# Altium PCB LEDS! PCB.PcbDoc
Units mm, origin at the board's own origin, x right, y up, seen from the top; angles counter-clockwise.
Board outline 26 x 20 mm, 2 copper layers (Top Layer, Bottom Layer); 8 components, 5 nets, 21 pads, 1 vias.
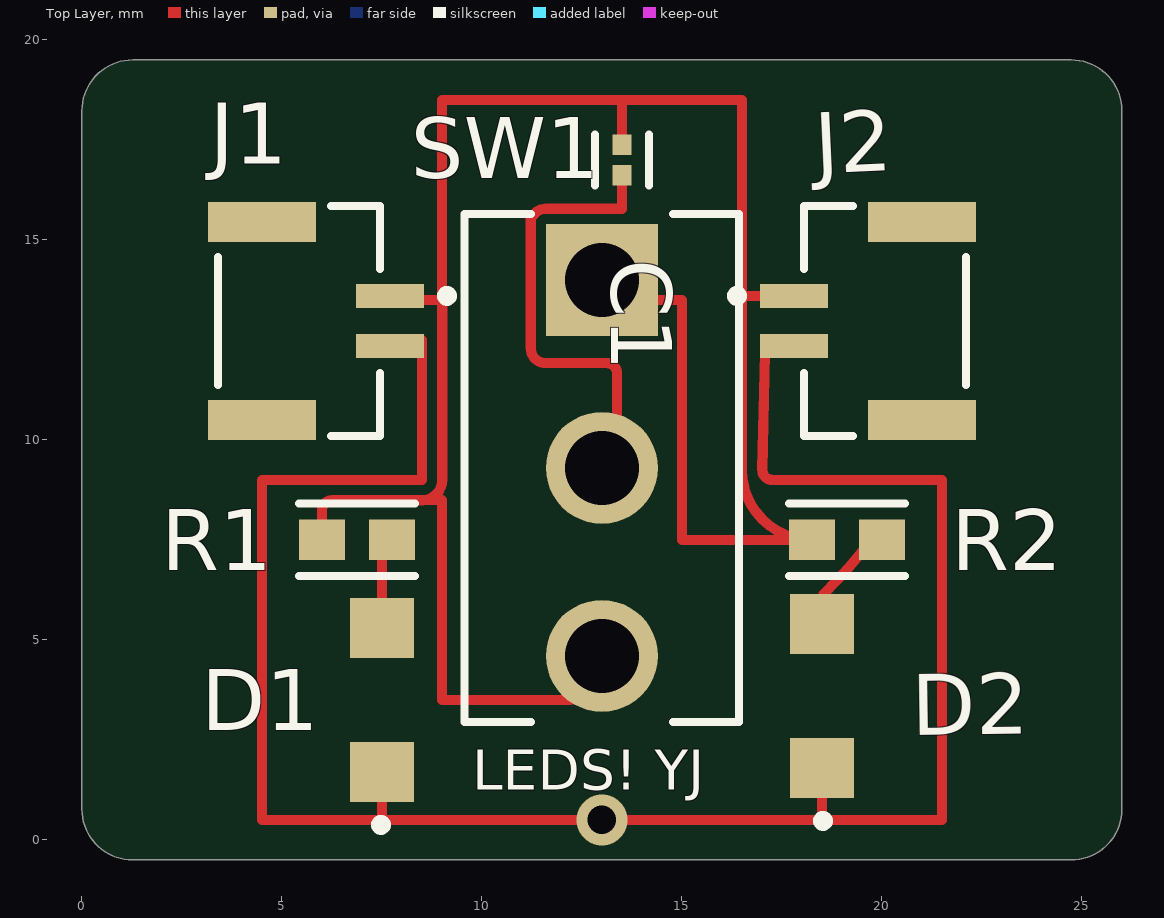
[diagram p0: Top Layer view]
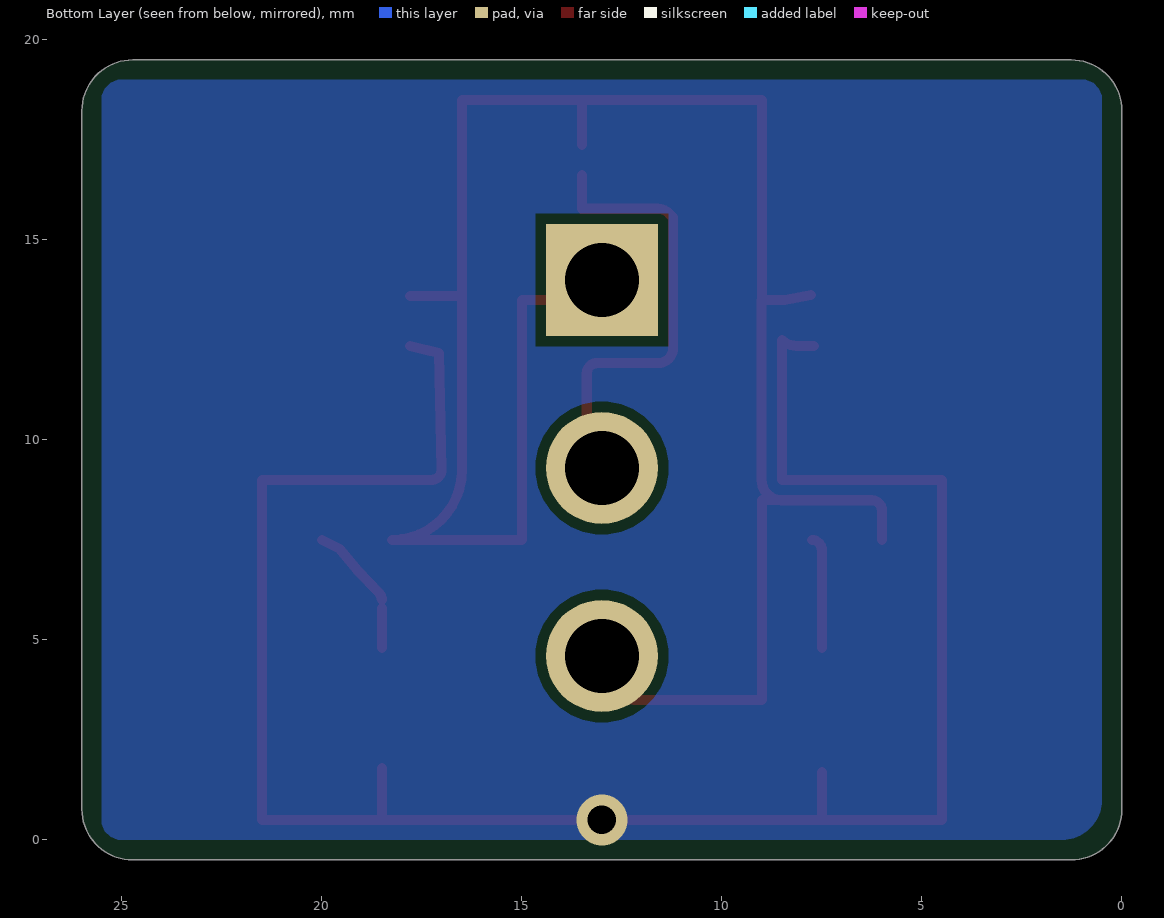
[diagram p1: Bottom Layer view, seen from below]
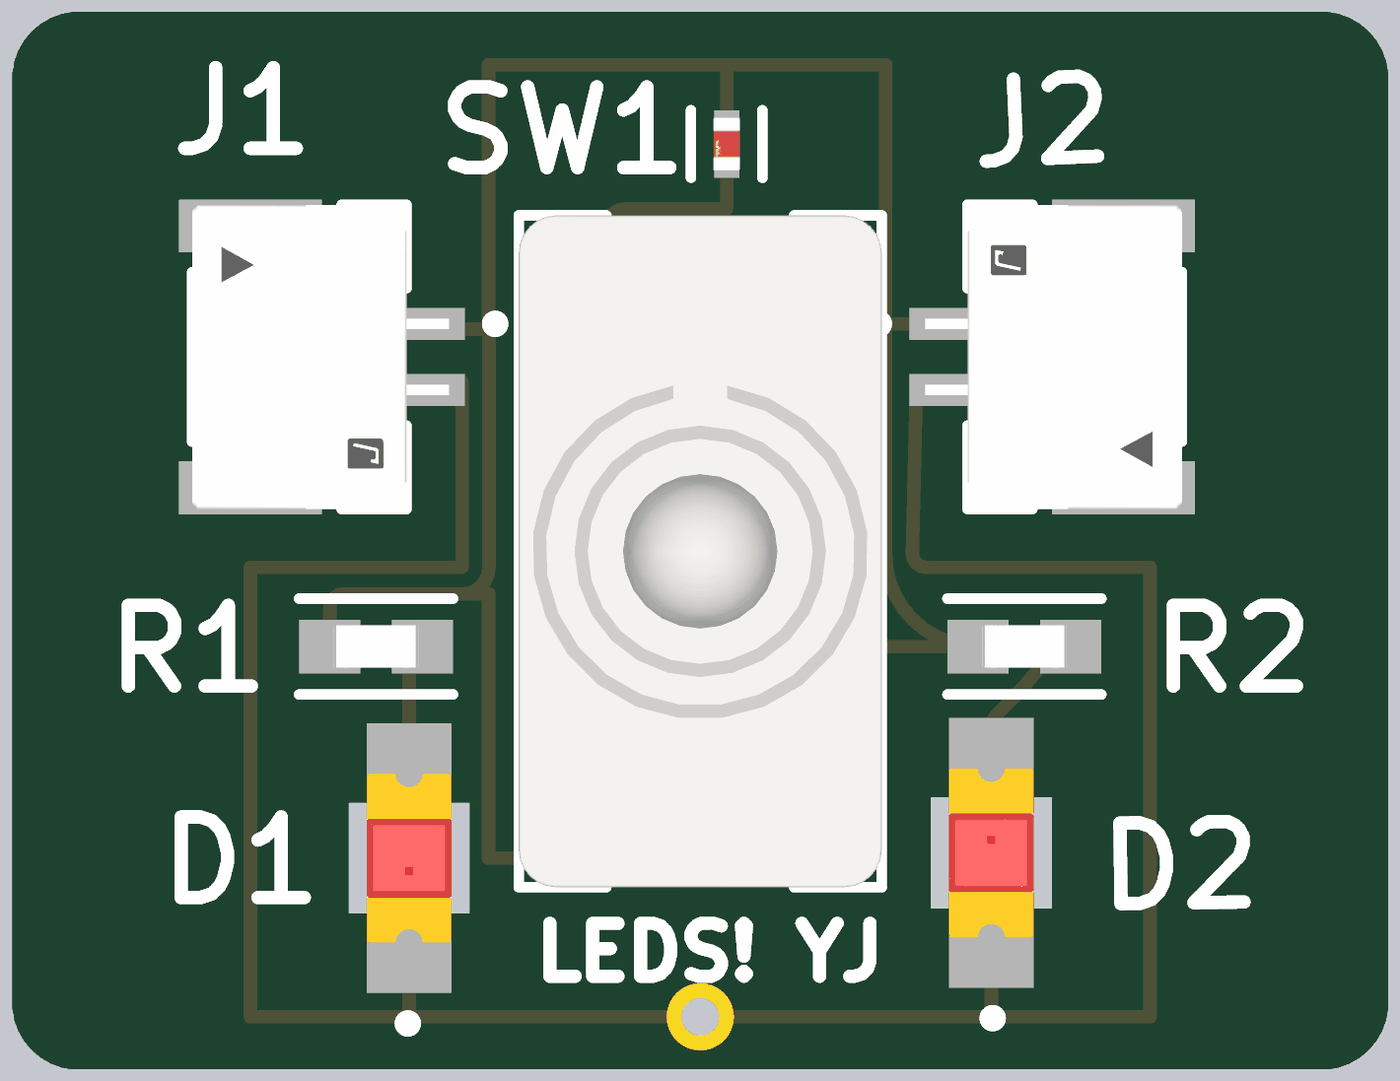
[diagram p2: 3D render of the assembled board from above, using the file's embedded part models]

## Layer stack, top to bottom
Top Solder: solder mask 0.0102, Solder Resist, Dk 3.5
Top Layer: signal copper 0.0356
Dielectric 1: dielectric 0.32, FR-4, Dk 4.8
Bottom Layer: signal copper 0.0356
Bottom Solder: solder mask 0.0102, Solder Resist, Dk 3.5

## Board outline
0,0.77 0,18.23 cw(c1.27,18.23) 1.27,19.5 24.73,19.5 cw(c24.73,18.23) 26,18.23 26,0.77 cw(c24.73,0.77) 24.73,-0.5 1.27,-0.5 cw(c1.27,0.77)

## Design rules (kind name [scope] priority, off if disabled: settings)
Clearance [C1 vs C1] p1: gap=0.254 ignorepadtopadclearanceinfootprint=FALSE except(0.15: SMDPad-SMDPad)
PolygonConnect [All] p1: connectstyle=Relief reliefconductorwidth=0.254 reliefentries=4 polygonreliefangle="90 Angle" airgapwidth=0.254
RoutingVias [All] p1: holewidth=0.711 width=1.27 viastyle="Through Hole" minholewidth=0.711 minwidth=1.27 maxholewidth=0.711 maxwidth=1.27
SolderMaskExpansion [All] p1: expansion=0 istentingtop=FALSE
SupplyNets "Schematic Supply Nets_1" [InNet('GND')] p1: voltage=0.000
SupplyNets "Schematic Supply Nets" [InNet('LED1_A')] p2: voltage=0.000
Width [All] p1: maxlimit=0.254 minlimit=0.254 preferedwidth=0.254
30 further rules are at their usual default settings.

## Components (designator, comment, footprint, x,y, rotation, side; value= is the part's Value field where it differs from the comment)
C1 "0.1 uF" FP-GRM155-0_05-IPC_C 13.5,17 r270 top
D1 "Red" FP-LTST-C230EKT-MFG 7.5,3.5 r90 top
D2 "Red" FP-LTST-C230EKT-MFG 18.5,3.6 r90 top
J1 "SM02B-GHS-TB(LF)(SN)" FP-SM02B-GHS-TB_LF_SN-MFG#1 5.425,12.975 r270 top
J2 "SM02B-GHS-TB(LF)(SN)" FP-SM02B-GHS-TB_LF_SN-MFG#2 20.075,12.975 r270 top
R1 "1k" FP-RN73R1J-IPC_A 6.875,7.5 r0 top
R2 "1k" FP-RN73R1J-IPC_A 19.125,7.5 r0 top
SW1 "Switch" FP-7103SYCQE-MFG 13,9.3 r0 top

## Footprints (in the part's own frame and the unit in brackets; to place one, negate y for a bottom-side part, rotate by r counter-clockwise, add the part's x,y. Pads: shape width x height; smd on the part's side, far side on the other; paste and mask are expansions set on the pad)
FP-7103SYCQE-MFG [mm]
  rect 2.8x2.8 hole 1.85 paste-2539.97 mask+0: 1(0,4.7)
  round 2.8 hole 1.85 paste-2539.97 mask+0: 2(0,0) 3(0,-4.7)
  silkscreen extent -3.43,-6.35 3.43,6.35, body extent -3.53,-6.45 3.53,6.45, height 0.25
FP-GRM155-0_05-IPC_C [mm]
  rect 0.515x0.472 smd paste+0 mask+0: 1(-0.379,0) 2(0.379,0)
  silkscreen extent -0.64,-0.67 0.64,0.67, body extent -0.74,-0.38 0.74,0.38, height 0.25
FP-LTST-C230EKT-MFG [mm]
  rect 1.5x1.6 smd paste+0 mask+0: 1(-1.8,0) 2(1.8,0)
  silkscreen extent -3.25,-0.1 -3,0.15, body extent -2.65,-0.95 2.65,0.95, height 0.25
FP-RN73R1J-IPC_A [mm]
  rect 1.156x1.012 smd paste+0 mask+0: 1(-0.875,0) 2(0.875,0)
  silkscreen extent -1.45,-0.91 1.45,0.91, body extent -1.95,-1.01 1.95,1.01, height 0.25
FP-SM02B-GHS-TB_LF_SN-MFG#1 [mm]
  rect 0.6x1.7 smd paste+0 mask+0: 1(-0.625,2.275) 2(0.625,2.275)
  rect 1x2.7 smd paste+0 mask+0: 3(-2.475,-0.925) 4(2.475,-0.925)
  silkscreen extent -2.88,-2.02 2.88,3.83, body extent -3.08,-2.37 3.08,3.22, height 0.25
FP-SM02B-GHS-TB_LF_SN-MFG#2 [mm]
  rect 0.6x1.7 smd paste+0 mask+0: 1(-0.625,-2.275) 2(0.625,-2.275)
  rect 1x2.7 smd paste+0 mask+0: 3(-2.475,0.925) 4(2.475,0.925)
  silkscreen extent -2.88,-3.82 2.88,2.02, body extent -2.88,-2.83 2.88,2.02, height 4.35

## Part data
C1: library part CMP-06035-003995-1, "Chip Multilayer Ceramic Capacitors for General Purpose, 0402, 0.10uF, X7R, 15%, 10%, 25V", Capacitance=100nF, Case Code (Imperial)=0402, Case Code (Metric)=1005, Dielectric=X7R, Max Operating Temperature=125°C, Min Operating Temperature=-55°C, Package Quantity=50000, Resistor Type=Ceramic, Tolerance=10%, Voltage Rating=25V, Case/Package=0402, Height=0.5mm, Length=0.039inch, Mount="Surface Mount", Packaging="Tape and Reel", Termination=SMD/SMT, Thickness=0.022inch, Voltage Rating (DC)=25V, Weight=0.000212oz, Width=0.5mm
D1 D2: library part CMP-22017-000030-1, "LED RED CLEAR CHIP SMD", Case Code (Imperial)=1206, Case Code (Metric)=3216, Forward Current=30mA, Forward Voltage=2V, Lens Color=Colorless, Max Operating Temperature=85°C, Min Operating Temperature=-55°C, Package Quantity=1, Power Dissipation=100mW, Reverse Voltage=5V, Test Current=10mA, Case/Package=1206, Color=Red, Depth=1.6mm, Dominant Wavelength=621nm, Height=1.1mm, Illumination Color=Red, Lead Free="Lead Free", Length=3.2mm, Lens Style=Diffused, Lens Transparency=Clear, Luminous Intensity=6mcd, Mount="Surface Mount", Number of Elements=1, Number of LEDs=1, Number of Pins=2, Packaging="Tape and Reel", Power Rating=100mW, Radiation Hardening=No, Viewing Angle=130°, Wavelength=630nm, Width=1.6mm
J1 J2: library part CMP-2000-07076-2, "CONN HEADER SMD R/A 2POS 1.25MM", Color=Natural, Current Rating=1A, Package Quantity=2500, Voltage Rating=50V, Connector Type="Outer Shroud Contact", Contact Material=Bronze, Contact Plating=Tin, Contact Type="Male Pin", Fastening Type=Latch, Housing Color=Natural, Housing Material=Nylon, Lead Free="Lead Free", Mount="Surface Mount", Number of Contacts=2, Number of Positions=2, Number of Rows=1, Orientation="Right Angle", Packaging="Tape and Reel", Pitch=0.049inch, Series=GH, Termination=Solder
R1 R2: library part CMP-04015-029754-1, "3kΩ ±1% 0.1W, 1/10W Chip Resistor 0603 (1608 Metric) Moisture Resistant Thin Film"
SW1: library part CMP-10041-000002-1, "SWITCH TOGGLE SPDT 5A 120V", Current Rating=5A, Insulation Resistance=1GR, Max Operating Temperature=85°C, Max Voltage Rating (AC)=250V, Max Voltage Rating (DC)=28V, Min Operating Temperature=-30°C, Package Quantity=1, Voltage Rating (AC)=120V, Actuator Length=10.67mm, Actuator Material=Brass, Actuator Type="Standard Round", Approvals=UL, Body Material="Stainless Steel", Contact Material=Silver, Contact Plating=Silver, Depth=6.86mm, Electrical Life=40000Cycles, Housing Material="Stainless Steel", Illumination Type=Non-Illuminated, Lead Free="Lead Free", Length=12.7mm, Max Current Rating=5A, Mount=Panel, Number of Poles=1, Number of Positions=3, Orientation=Straight, Packaging=Bulk, Radiation Hardening=No, REACH SVHC="No SVHC", RoHS Compliant=Yes, Series=7000, Switch Function=On-Off-On, Termination="PC Pin", Throw Configuration=SPDT, Voltage Rating (DC)=28V

## Via types
v1: diameter 1.27, hole 0.711, Top Layer to Bottom Layer, 1 vias

## Nets (pads, with @x,y where several pads share a name; then routed paths per layer and width w, separated by ;. In a path a pad name is that pad's centre, name@x,y a point inside that pad or via, vN(x,y) a via of type N, cw(c..) or ccw(c..) an arc to the next point about the centre after c; other vN are vias at no path point)
GND: D1.1 D2.1 J1.2 J2.2 | length 53.1
  Top Layer w0.254: D1.1 7.5,0.5 ; J1.2 8.138,12.35 ccw(c8.138,12.862) 8.5,12.5 8.5,9 4.5,9 4.5,0.5 7.5,0.5 ; J2.2 17.077,12.177 17.008,9.259 ccw(c17.262,9.254) 17.262,9 21.5,9 21.5,0.5 18.5,0.5 ; D2.1 18.5,0.5 ; 7.5,0.5 v1(13,0.5) 18.5,0.5
LED1_A: C1.1 J1.1 J2.1 R1.1 R2.1 SW1.1 SW1.3 | length 58.2
  Top Layer w0.254: R1.1 6,8.238 cw(c6.254,8.238) 6.254,8.492 8.5,8.492 ccw(c8.5,9) 8.508,8.492 ; J1.1@7.775,13.625 8.423,13.5 9,13.5 ; SW1.3@13,4.3 cw(c12.2,4.3) 12.2,3.5 9,3.5 9,8.5 8.508,8.492 ; SW1.1@13,13.7 ccw(c13.2,13.7) 13.2,13.5 15,13.5 15,7.5 R2.1 cw(c18.249,9.249) 16.5,9.249 16.5,13.5 ; C1.1 13.5,18.5 ; 16.5,15.76 16.5,13.5 ; 16.5,15.761 16.5,18.5 13.5,18.5 ; J2.1 16.6,13.6 ccw(c16.6,13.5) 16.5,13.5 ; 8.508,8.492 ccw(c8.5,9) 9.008,9.001 9.008,12.5 9.008,13.5 9,13.5 ; 9,13.5 9,18.5 13.5,18.5
NetC1_2: C1.2 SW1.2 | length 11.9
  Top Layer w0.254: SW1.2@13,9 ccw(c13,9.379) 13.379,9.379 13.379,11.665 ccw(c13.125,11.665) 13.125,11.919 11.6,11.919 cw(c11.6,12.3) 11.219,12.3 11.219,15.1 cw(c11.6,15.1) 11.219,15.101 11.219,15.558 11.331,15.669 cw(c11.6,15.4) 11.6,15.781 13.5,15.781 C1.2
NetD1_2: D1.2 R1.2 | length 2.8
  Top Layer w0.254: D1.2@7.5,4.8 7.5,7.249 cw(c7.751,7.249) R1.2
NetD2_2: D2.2 R2.2 | length 3.2
  Top Layer w0.254: D2.2@18.5,4.8 D2.2@18.5,5.8 ; D2.2@18.5,6 cw(c18.754,6) 18.571,6.176 19.102,6.73 ccw(c18.827,6.994) 19.122,6.753 19.549,7.269 R2.2
pads on no net: J1.3 J1.4 J2.3 J2.4

## Polygon pours and split planes (outlines as drawn)
GND on Bottom Layer "GND_L02_P000" (solid, pour order 0): 25,19 cw(c25,18.5) 25.5,18.5 25.5,0.5 cw(c25,0.5) 25,0 1.5,0 cw(c1.5,1) 0.5,1 0.5,18.5 cw(c1,18.5) 1,19 3.5,19

## Silkscreen, mask and mechanical layers (free items; w line width, h text height)
Top Overlay:
  text "LEDS! YJ" at 9.754,1.254 h1
Mechanical 1:
  lines w0.254: 0,0.77 ccw(c1.27,0.77) 1.27,-0.5 9.5,-0.5 24.73,-0.5 ccw(c24.73,0.77) 26,0.77 26,18.23 ccw(c24.73,18.23) 24.73,19.5 1.27,19.5 ccw(c1.27,18.23) 0,18.23 0,0.77